# Altium PCB Receiver.PcbDoc
Units mm, origin at the board's own origin, x right, y up, seen from the top; angles counter-clockwise.
Board outline 76.07 x 76.47 mm, 2 copper layers (Top Layer, Bottom Layer); 36 components, 36 nets, 131 pads, 12 vias.
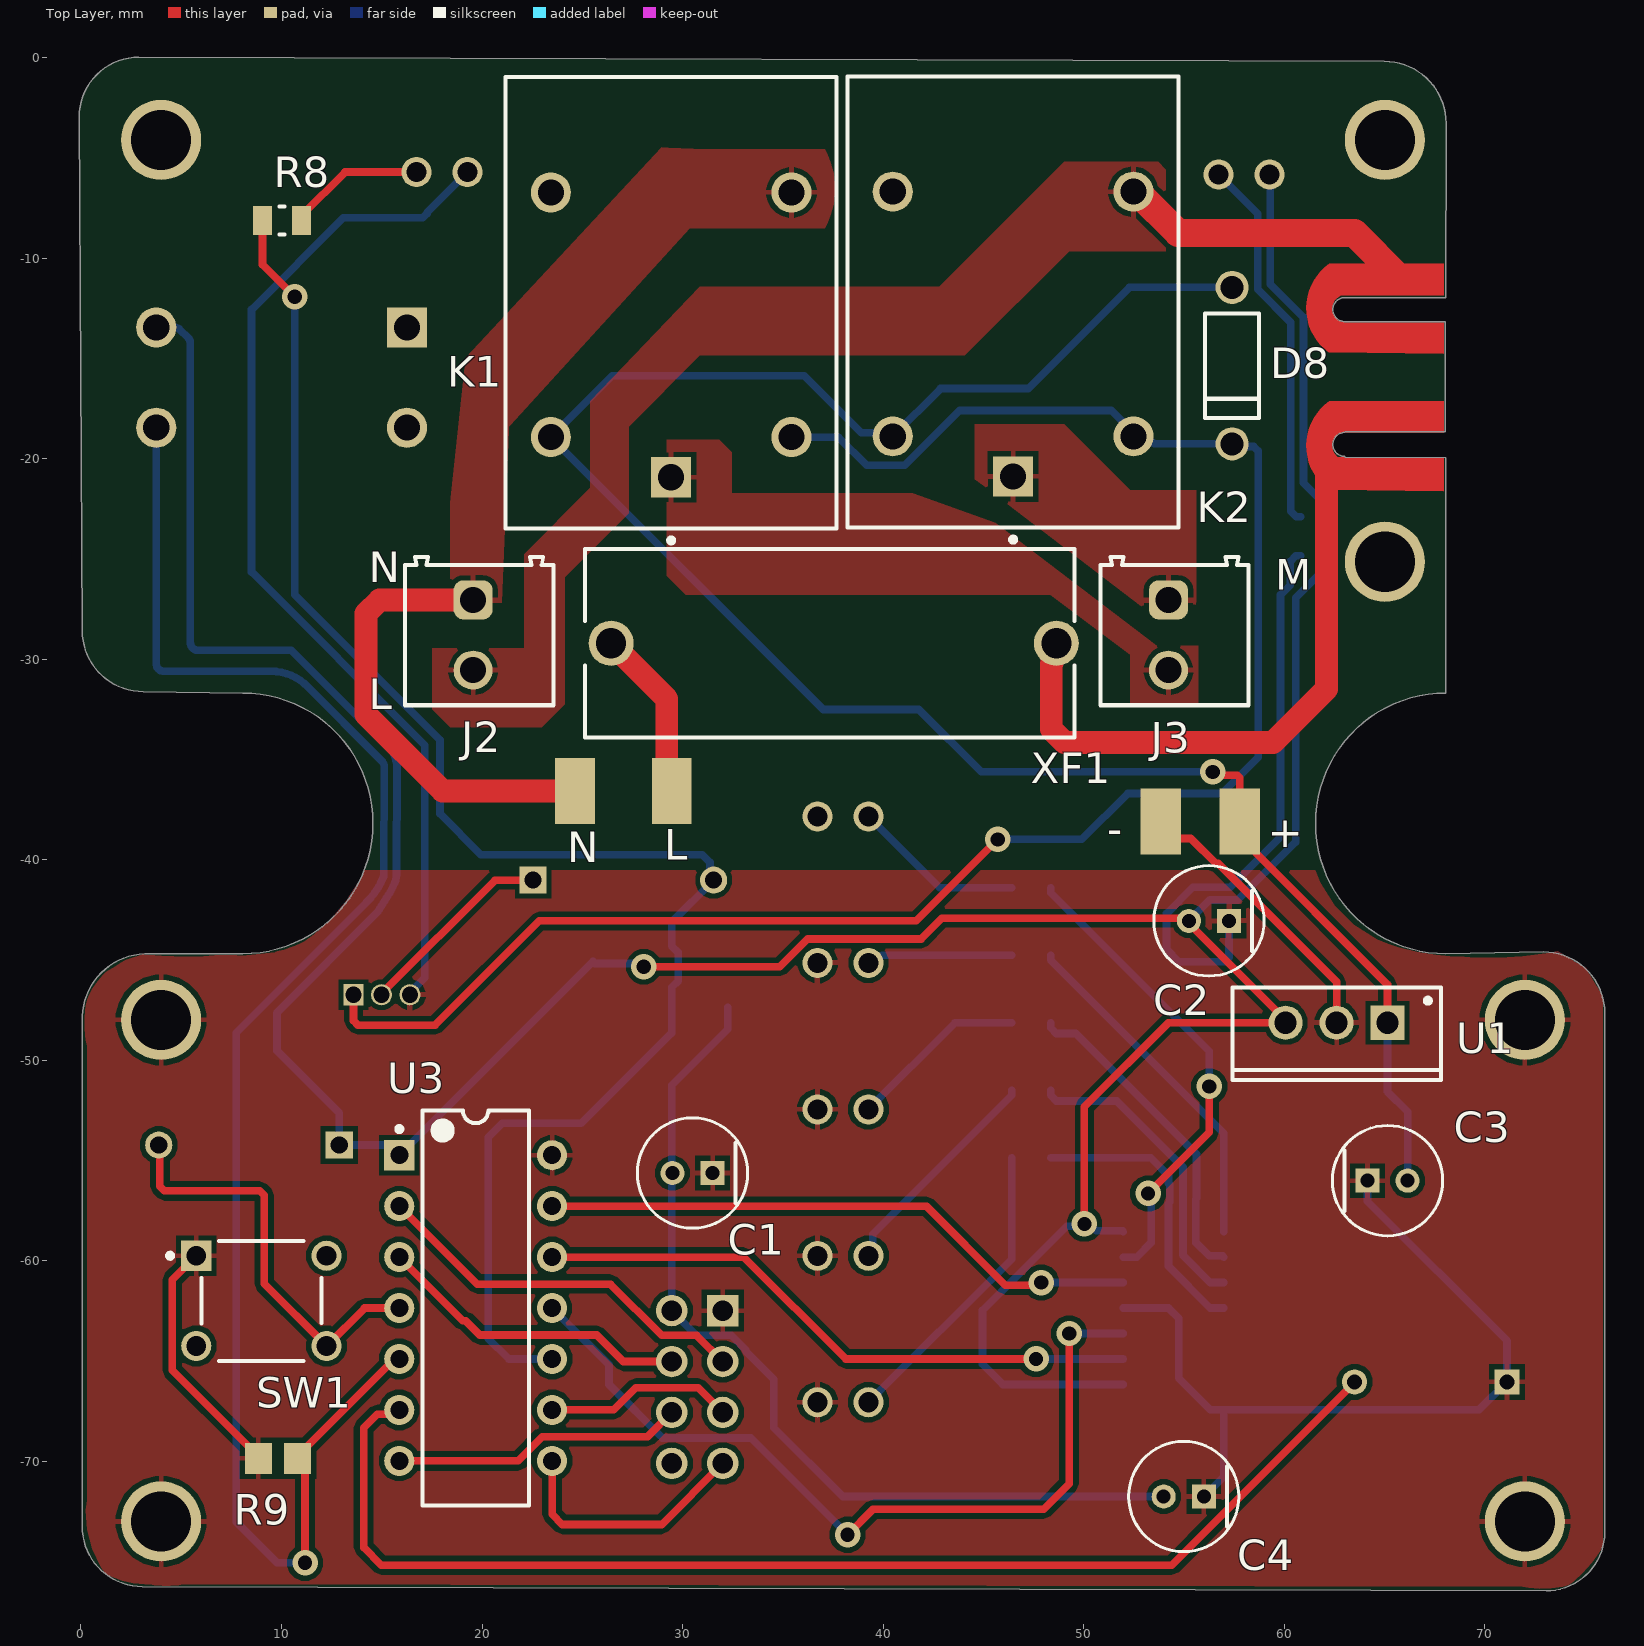
[diagram p0: Top Layer view]
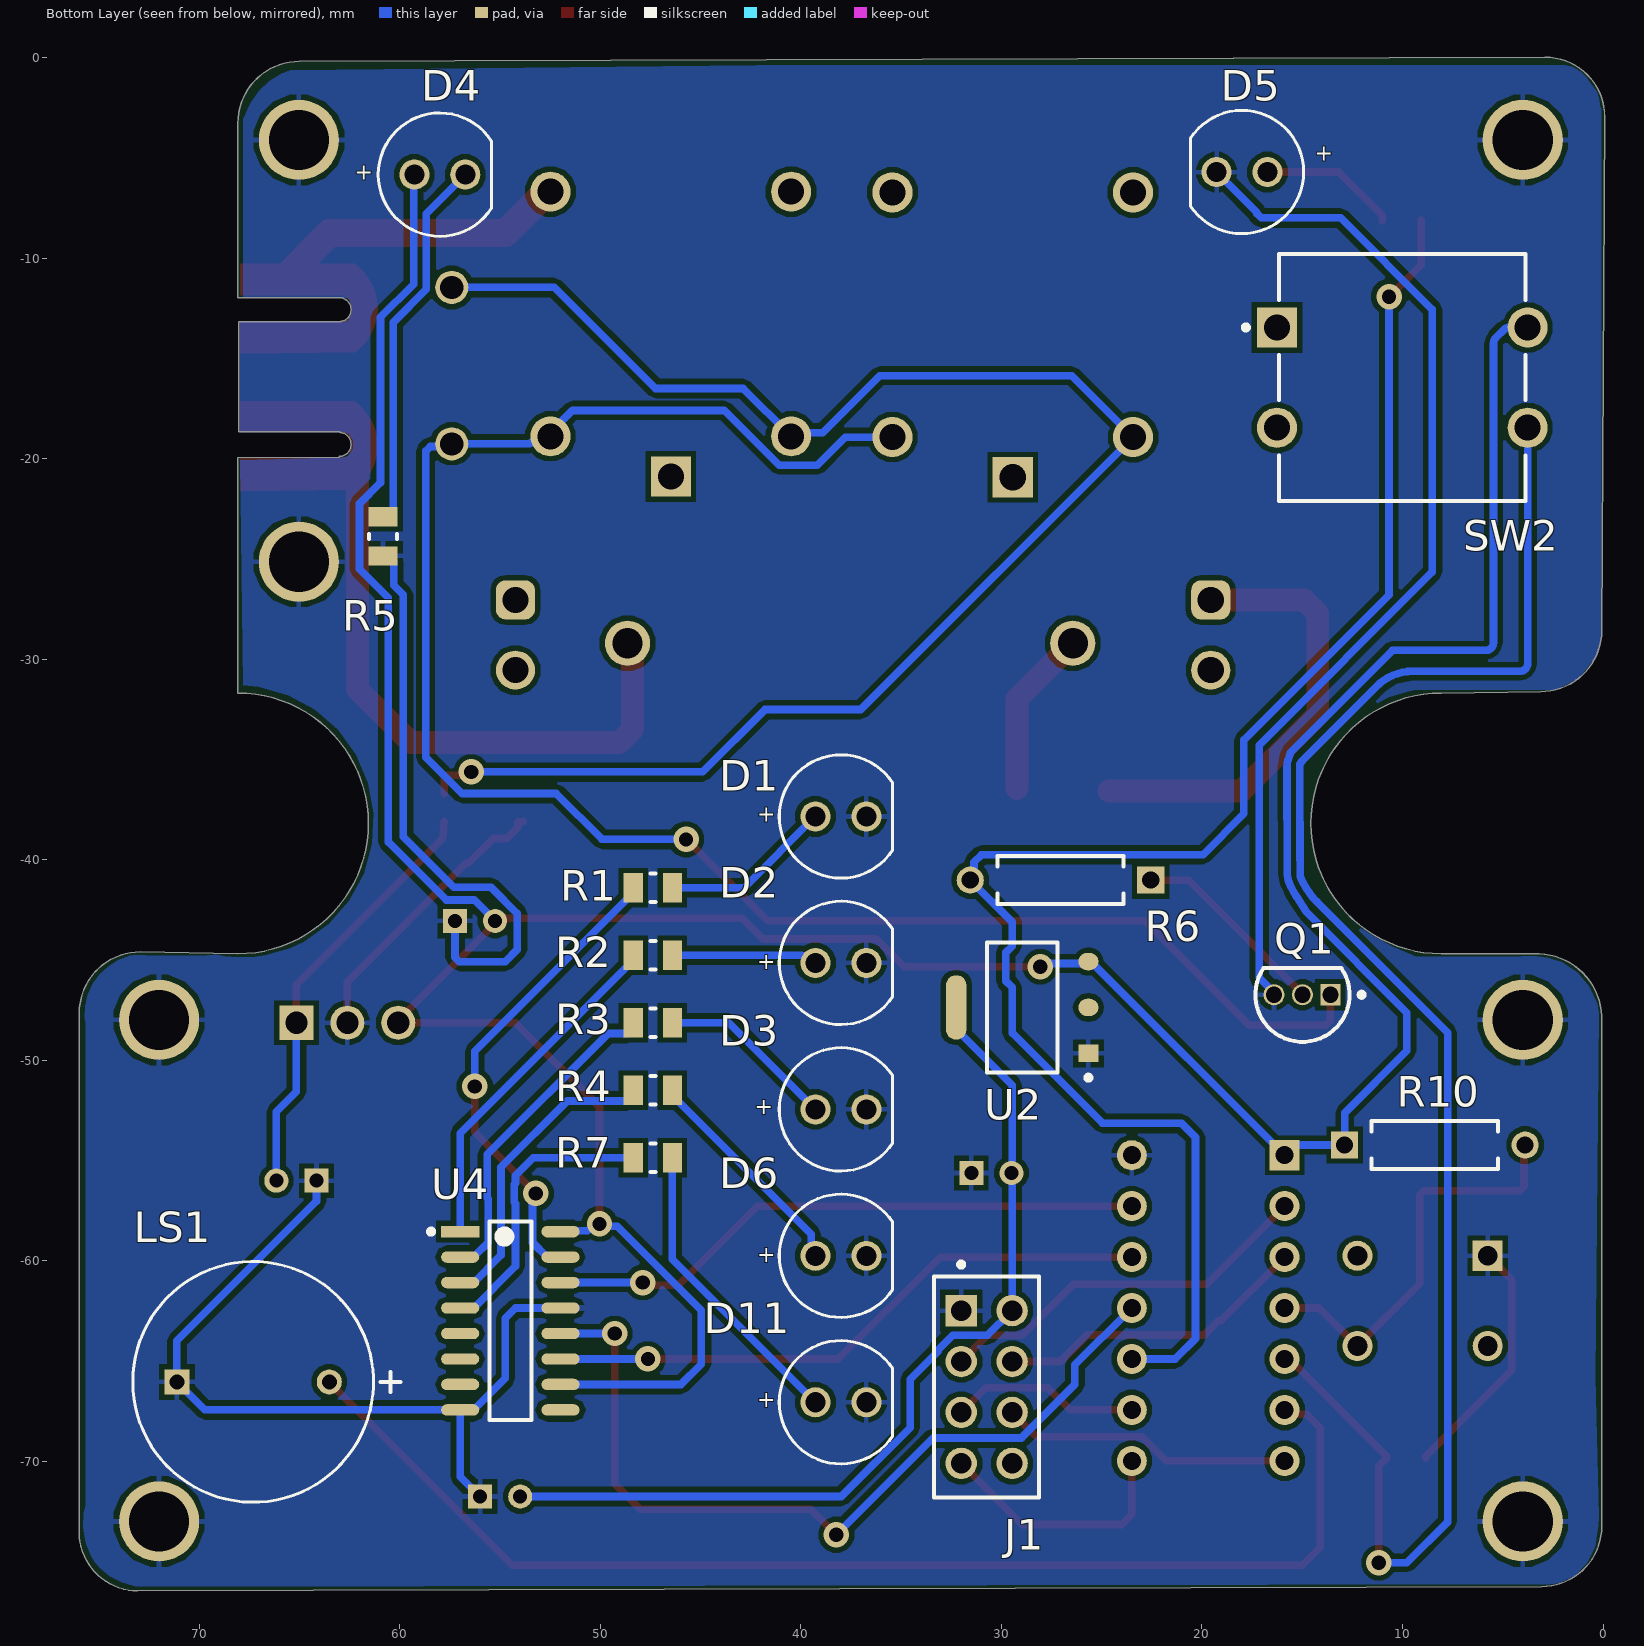
[diagram p1: Bottom Layer view, seen from below]
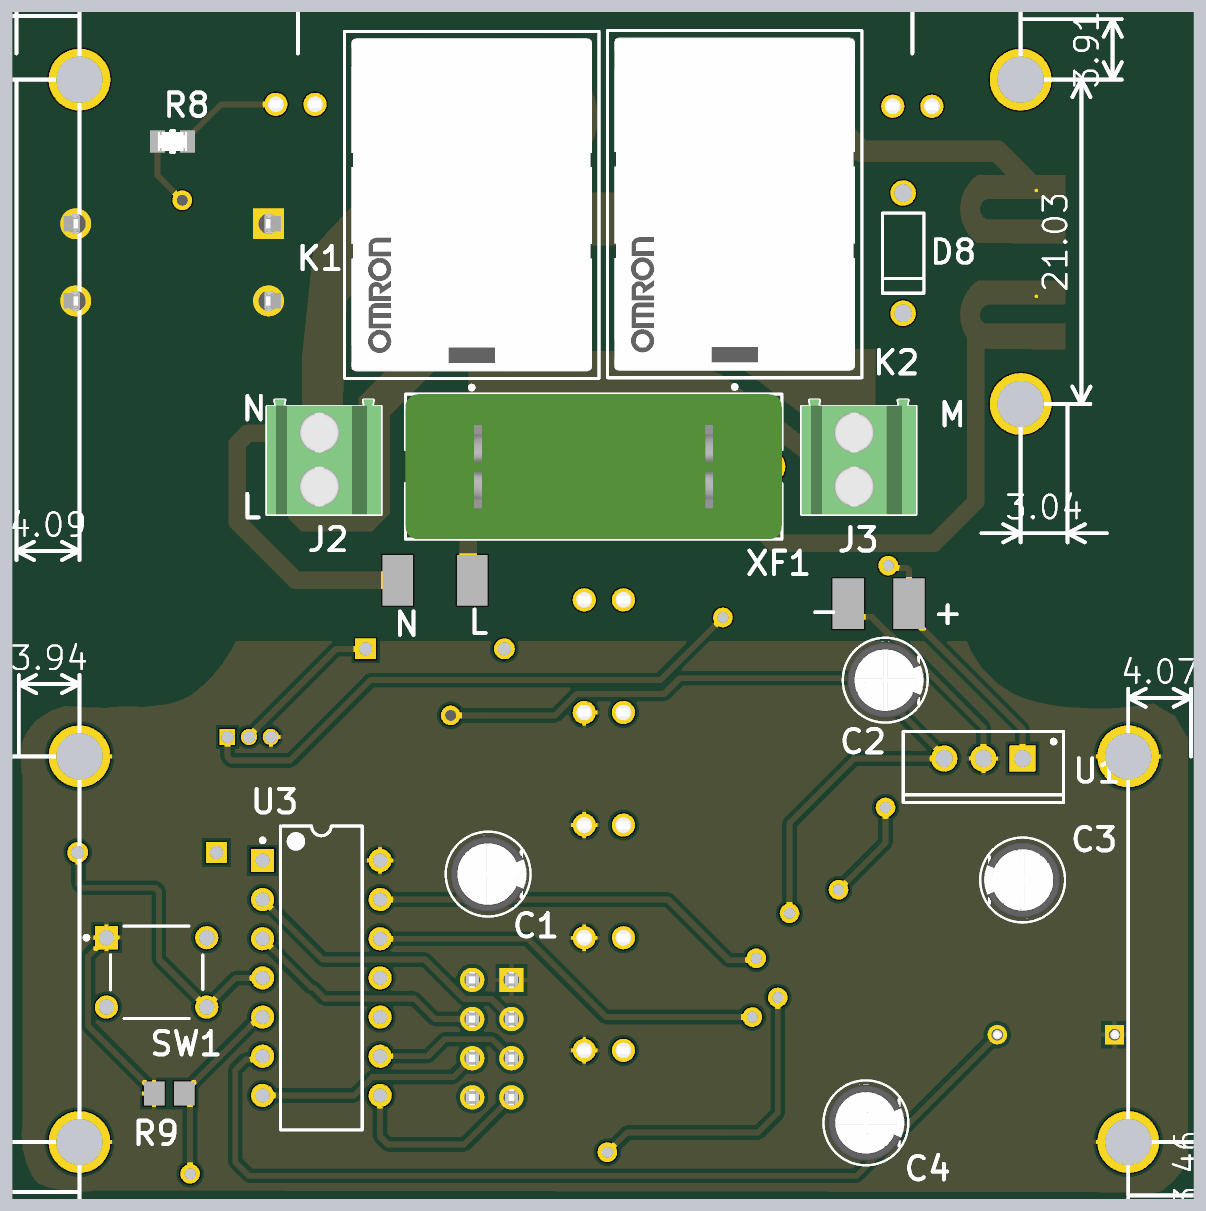
[diagram p2: 3D render of the assembled board from above, using the file's embedded part models]
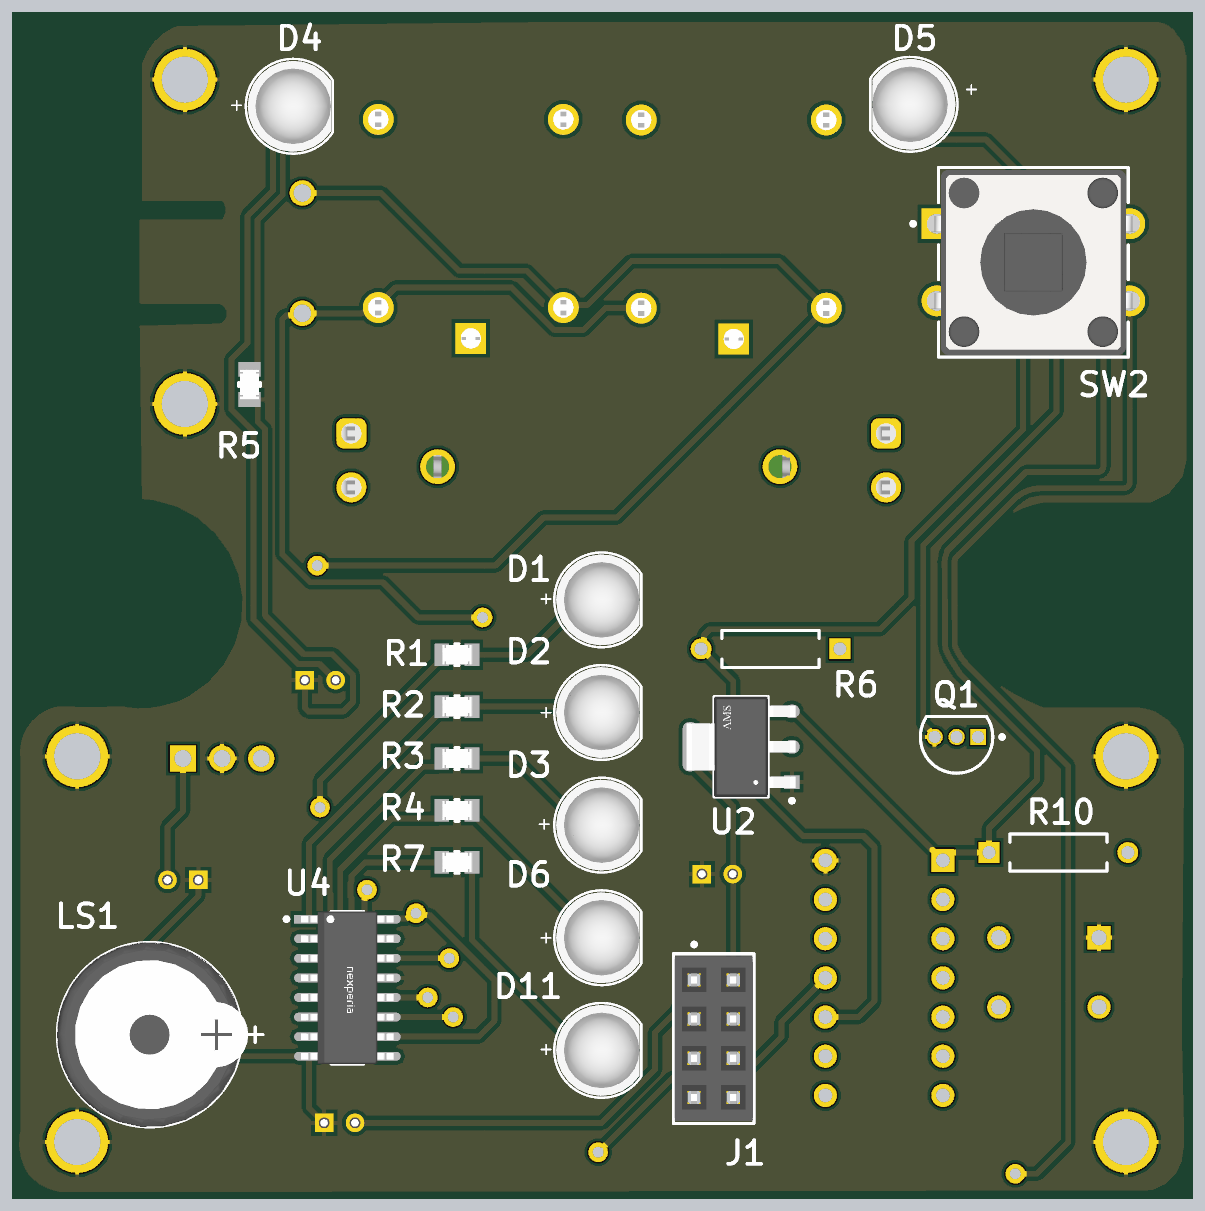
[diagram p3: 3D render of the assembled board from below, using the file's embedded part models]

## Layer stack, top to bottom
Top Solder: solder mask 0.0102, Solder Resist, Dk 3.5
Top Layer: signal copper 0.0356
Dielectric 1: dielectric 0.32, FR-4, Dk 4.8
Bottom Layer: signal copper 0.0356
Bottom Solder: solder mask 0.0102, Solder Resist, Dk 3.5

## Board outline
0.064,-73.244 ccw(c3.065,-73.244) 3.065,-76.245 73.058,-76.457 ccw(c73.058,-73.533) 75.981,-73.533 75.981,-47.649 ccw(c72.933,-47.649) 72.933,-44.6 68.064,-44.691 cw(c68.064,-38.191) 68.064,-31.691 68.064,-19.968 68.064,-19.962 63.024,-19.927 63.024,-19.897 cw(c63.024,-19.297) 63.024,-18.697 63.024,-18.669 68.033,-18.669 68.033,-13.176 63.024,-13.176 63.024,-13.173 cw(c63.024,-12.573) 63.024,-11.973 63.024,-11.974 68.064,-11.974 68.071,-3.275 68.072,-3.275 ccw(c64.998,-3.275) 64.998,-0.202 2.893,0.013 ccw(c2.893,-2.965) -0.085,-2.965 0.064,-28.578 ccw(c3.107,-28.578) 3.107,-31.621 8.064,-31.691 cw(c8.064,-38.191) 8.064,-44.691 3.182,-44.691 ccw(c3.315,-47.942) 0.064,-47.809 0.064,-47.752

## Design rules (kind name [scope] priority, off if disabled: settings)
Clearance Clearance_1 [OnMid vs OnMid] p1: gap=0.254 ignorepadtopadclearanceinfootprint=FALSE sourcerule=41 cellrowname=All cellrowtype=0 cellcolname=All cellcoltype=0 innerlayers=TRUE
Clearance Clearance_2 [(ExistsOnLayer('Top Layer') Or ExistsOnLayer('Bottom Layer')) vs (ExistsOnLayer('Top Layer') Or ExistsOnLayer('Bottom Layer'))] p2: gap=0.254 ignorepadtopadclearanceinfootprint=FALSE sourcerule=41 cellrowname=All cellrowtype=0 cellcolname=All cellcoltype=0 outerlayers=TRUE
Clearance [All] p3: gap=0.254 ignorepadtopadclearanceinfootprint=FALSE ismatrix=TRUE
HoleSize MaxMinHoleSize_2 [All] p1: absolutevalues=TRUE maxlimit=6.54 minlimit=0.254 maxpercent=80.000 minpercent=20.000
HoleSize [All] p2: absolutevalues=TRUE maxlimit=6.54 minlimit=0.025 maxpercent=80.000 minpercent=20.000
MinimumSolderMaskSliver [All] p1: minsoldermaskwidth=0.127
PolygonConnect [All] p1: connectstyle=Relief reliefconductorwidth=0.254 reliefentries=4 polygonreliefangle="90 Angle" airgapwidth=0.254
RoutingVias [All] p1: holewidth=0.711 width=1.27 viastyle="Through Hole" minholewidth=0.711 minwidth=1.27 maxholewidth=0.711 maxwidth=1.27
SilkToSilkClearance [All] p1: silktosilkclearance=0.127
SilkToSolderMaskClearance SilkToSolderMaskClearance_1 [All] p1: minsilkscreentomaskgap=0 clearancetoexposedcopper=TRUE
SilkToSolderMaskClearance [IsPad] p2: minsilkscreentomaskgap=0.127 clearancetoexposedcopper=TRUE
SolderMaskExpansion [All] p1: expansion=0.102 istentingtop=FALSE
Width MaxMinWidth_4 [All] p1: maxlimit=0.381 minlimit=0.254 preferedwidth=0.254 minimp=50.000000 maximp=50.000000 favimp=50.000000
Width MaxMinWidth_2 [All] p2: maxlimit=0.635 minlimit=0.254 preferedwidth=0.254 minimp=50.000000 maximp=50.000000 favimp=50.000000
Width MaxMinWidth_1 [All] p3: maxlimit=0.635 minlimit=0.254 preferedwidth=0.381 minimp=50.000000 maximp=50.000000 favimp=50.000000
Width MaxMinWidth_3 [All] p4: maxlimit=0.254 minlimit=0.254 preferedwidth=0.254
26 further rules are at their usual default settings.

## Components (designator, comment, footprint, x,y, rotation, side; value= is the part's Value field where it differs from the comment)
C1 "EEUFR1H100" FP-RAD-TH-D_5_0_5-L_11_1-MFG 30.496,-55.626 r180 top
C2 "EEUFR1H100" FP-RAD-TH-D_5_0_5-L_11_1-MFG 56.245,-43.053 r180 top
C3 "EEUFR1H100" FP-RAD-TH-D_5_0_5-L_11_1-MFG 65.151,-56.007 r0 top
C4 "EEUFR1H100" FP-RAD-TH-D_5_0_5-L_11_1-MFG 54.991,-71.755 r180 top
D1 "151051BS04000" WL-TMRC_D5.9H8.7 38,-37.846 r180 bottom
D2 "151051BS04000" WL-TMRC_D5.9H8.7 38,-45.149 r180 bottom
D3 "151051BS04000" WL-TMRC_D5.9H8.7 38,-52.451 r180 bottom
D4 "151051VS04000" WL-TMRC_D5.9H8.7 58,-5.842 r180 bottom
D5 "151051BS04000" WL-TMRC_D5.9H8.7 18,-5.715 r0 bottom
D6 "151051BS04000" WL-TMRC_D5.9H8.7 38,-59.754 r180 bottom
D8 "1N4007" FAIR-DO-41-2 57.404,-15.367 r270 top
D11 "151051BS04000" WL-TMRC_D5.9H8.7 38,-67.056 r180 bottom
J1 "PPTC042LFBN-RC" FP-PPTC042LFBN-RC-MFG 30.734,-66.294 r270 bottom
J2 "691214110002" 691214110002 19.858,-28.801 r270 top
J3 "691214110002" 691214110002 54.529,-28.801 r270 top
K1 "G5LE-1-E DC24" FP-G5LE-1-E_DC24-MFG 29.433,-12.231 r90 top
K2 "G5LE-1-E DC24" FP-G5LE-1-E_DC24-MFG 46.482,-12.192 r90 top
LS1 "MCKPX-G1203A-K4056" FP-MCKPX-G1203A-K4056-MFG 67.31,-66.04 r180 bottom
Q1 "P2N2222AG" ONSC-TO-92-3-29-11 14.986,-46.736 r0 bottom
R1 "CRCW0805330RFKEA" FP-CRCW0805-e3-MFG 47.381,-41.402 r180 bottom
R2 "CRCW0805330RFKEA" FP-CRCW0805-e3-MFG 47.381,-44.767 r180 bottom
R3 "CRCW0805330RFKEA" FP-CRCW0805-e3-MFG 47.381,-48.133 r180 bottom
R4 "CRCW0805330RFKEA" FP-CRCW0805-e3-MFG 47.381,-51.498 r180 bottom
R5 "CRCW0805330RFKEA" FP-CRCW0805-e3-MFG 60.833,-23.876 r90 bottom
R6 "MFR-25FBF52-47K5" RESA60-630X240 27.051,-41.021 r0 bottom value=1k
R7 "CRCW0805330RFKEA" FP-CRCW0805-e3-MFG 47.381,-54.864 r180 bottom
R8 "CRCW0805330RFKEA" FP-CRCW0805-e3-MFG 10.033,-8.128 r180 top
R9 "ERJ-6ENF1001V" RESC2013X70X40ML20T20 9.82,-69.85 r0 top
R10 "MFR-25FBF52-47K5" RESA60-630X240 8.382,-54.229 r180 bottom value=10k
SW1 "1825910-6" TECO-1825910-6_V 9,-62 r0 top
SW2 "FSM103" FP-FSM103-MFG 10.006,-15.962 r0 bottom
U1 "L7805CV" TO220 62.611,-48.133 r180 top
U2 "AMS1117-3.3" FP-AMS1117-IPC_C 28.956,-47.371 r0 bottom
U3 "ATtiny84-20PU" 14P3 19.685,-62.357 r0 top
U4 "74HC595D,118" FP-SOT109-1-IPC_B 54.483,-62.992 r180 bottom
XF1 "696108003002" 696108003002 37.338,-29.21 r0 top

## Footprints (in the part's own frame and the unit in brackets; to place one, negate y for a bottom-side part, rotate by r counter-clockwise, add the part's x,y. Pads: shape width x height; smd on the part's side, far side on the other; paste and mask are expansions set on the pad)
14P3 [mm] "DIP, 14-Pin, Row Spacing 7.62 mm, Pitch 2.54 mm"
  rect 1.5x1.5 hole 0.9: 1(-3.81,7.62)
  round 1.5 hole 0.9: 2(-3.81,5.08) 3(-3.81,2.54) 4(-3.81,0) 5(-3.81,-2.54) 6(-3.81,-5.08) 7(-3.81,-7.62) 8(3.81,-7.62) 9(3.81,-5.08) 10(3.81,-2.54) 11(3.81,0) 12(3.81,2.54) 13(3.81,5.08) 14(3.81,7.62)
  silkscreen extent -3.93,-9.85 2.65,9.85, body extent -3.55,-9.85 3.55,9.85, height 5.33
691214110002 [mm] "3.50 mm Horizontal Entry Modular, 2p"
  rrect50% 1.95x1.95 hole 1.3: 1(-1.75,-0.3)
  round 1.95 hole 1.3: 2(1.75,-0.3)
  silkscreen extent -3.9,-3.7 3.5,3.7, body extent -3.95,-3.7 3.5,3.7, height 8.55
696108003002 [mm] "FUSEHOLDER BLOCKS - PCB - CLIP COVER - THT"
  round 2.25 hole 1.5: 1(-10.9,0) 2(11.3,0)
  silkscreen extent -12.2,-4.7 12.2,4.7, body extent -12.2,-4.7 12.2,4.7, height 11.55
FAIR-DO-41-2 [mm] "THD, 2-Leads, Body 5.2x2.72mm, Pin Spacing 7.8mm"
  round 1.65 hole 1.15: 1(-3.9,0) 2(3.9,0)
  silkscreen extent -2.6,-1.35 2.6,1.35, body extent -4.29,-1.17 4.29,1.17, height 2.35
FP-AMS1117-IPC_C [mm]
  rect 1.004x0.872 smd paste+0 mask+0: 1(-3.295,2.29)
  rrect100% 1.004x0.872 smd paste+0 mask+0: 2(-3.295,0) 3(-3.295,-2.29)
  rrect87% 1.004x3.182 smd paste+0 mask+0: 4(3.295,0)
  silkscreen extent -3.42,-3.25 1.75,3.62, body extent -3.53,-3.25 3.53,3.25, height 1.8
FP-CRCW0805-e3-MFG [mm]
  rect 0.95x1.45 smd paste+0 mask+0: 1(-0.975,0) 2(0.975,0)
  silkscreen extent -0.13,-0.7 0.13,0.7, body extent -1,-0.63 1,0.63, height 0.5
FP-FSM103-MFG [mm]
  rect 2x2 hole 1.3 paste-2539.97 mask+0: 1(6.25,-2.5)
  round 2 hole 1.3 paste-2539.97 mask+0: 2(-6.25,-2.5) 3(6.25,2.5) 4(-6.25,2.5)
  silkscreen extent -6.15,-6.15 7.93,6.15, body extent -7.05,-6 7.05,6, height 7.36
FP-G5LE-1-E_DC24-MFG [mm]
  rect 2x2 hole 1.3 paste-2539.97 mask+0: 1(-8.7,0)
  round 2 hole 1.3 paste-2539.97 mask+0: 2(-6.7,-6) 3(5.5,-6) 4(5.5,6) 5(-6.7,6)
  silkscreen extent -11.97,-8.25 11.25,8.25, body extent -11.35,-8.35 11.35,8.35, height 0.25
FP-MCKPX-G1203A-K4056-MFG [mm]
  rect 1.25x1.25 hole 0.75 paste-2539.97 mask+0: 1(-3.8,0)
  round 1.25 hole 0.75 paste-2539.97 mask+0: 2(3.8,0)
  silkscreen extent -6,-6 7.35,6, body extent -6,-6 6.38,6, height 9.5
FP-PPTC042LFBN-RC-MFG [mm]
  rect 1.57x1.57 hole 1.02 paste-2539.97 mask+0: 1(-3.81,-1.27)
  round 1.57 hole 1.02 paste-2539.97 mask+0: 2(-3.81,1.27) 3(-1.27,-1.27) 4(-1.27,1.27) 5(1.27,-1.27) 6(1.27,1.27) 7(3.81,-1.27) 8(3.81,1.27)
  silkscreen extent -6.23,-2.62 5.51,2.62, body extent -5.33,-2.54 5.33,2.54, height 8.65
FP-RAD-TH-D_5_0_5-L_11_1-MFG [mm]
  rect 1.2x1.2 hole 0.7 paste-2539.97 mask+0: 1(-1,0)
  round 1.2 hole 0.7 paste-2539.97 mask+0: 2(1,0)
  silkscreen extent -2.75,-2.75 2.75,2.75, body extent -2.85,-2.85 2.85,2.85, height 0.25
FP-SOT109-1-IPC_B [mm]
  rect 1.904x0.568 smd paste+0 mask+0: 1(-2.501,4.445)
  rrect100% 1.904x0.568 smd paste+0 mask+0: 2(-2.501,3.175) 3(-2.501,1.905) 4(-2.501,0.635) 5(-2.501,-0.635) 6(-2.501,-1.905) 7(-2.501,-3.175) 8(-2.501,-4.445) 9(2.501,-4.445) 10(2.501,-3.175) 11(2.501,-1.905) 12(2.501,-0.635) 13(2.501,0.635) 14(2.501,1.905) 15(2.501,3.175) 16(2.501,4.445)
  silkscreen extent -4.08,-4.95 1.05,4.95, body extent -3,-4.95 3,4.95, height 1.75
ONSC-TO-92-3-29-11 [mm] "TO, 3-Leads, Body Dia 4.7mm, Pitch 1.27mm"
  rect 1x1.05 hole 0.8: 1(-1.391,0)
  round 1.05 hole 0.8: 2(0,0) 3(1.422,0)
  silkscreen extent -3.07,-1.34 2.35,2.35, body extent -2.35,-1.33 2.36,2.36, height 7.87
RESA60-630X240 [mm] "Axial Resistor, 2-Leads, Dia 2.4mm, Body Length 6.3mm"
  rect 1.35x1.35 hole 0.85: 1(-4.5,0)
  round 1.35 hole 0.85: 2(4.5,0)
  silkscreen extent -3.15,-1.2 3.15,1.2, body extent -4.78,-1.2 4.78,1.2, height 2.4
RESC2013X70X40ML20T20 [mm] "Chip Resistor, 2-Leads, Body 2.00x1.25mm, IPC Low Density"
  rect 1.35x1.55 smd: 1(-0.975,0) 2(0.975,0)
  body extent -1.1,-0.72 1.1,0.72, height 0.7
TECO-1825910-6_V [mm] "Switch, 4-Leads, Body 5.99x5.99mm"
  rect 1.5x1.5 hole 0.99: 1(-3.25,2.25)
  round 1.5 hole 0.99: 2(3.25,2.25) 3(-3.25,-2.25) 4(3.25,-2.25)
  silkscreen extent -4.67,-3 2.99,3, body extent -3,-2.99 3,3, height 5
TO220 [mm] "TO, Thru-Hole, Vertical, Heatsink Mounted; 3 In-Line Leads; Pitch 2.54 mm"
  rect 1.7x1.7 hole 1.1: 1(-2.54,0)
  round 1.7 hole 1.1: 2(0,0) 3(2.54,0)
  silkscreen extent -5.2,-1.75 5.2,2.85, body extent -5.25,-1.8 5.25,2.9, height 19.7
WL-TMRC_D5.9H8.7 [mm] "THT Mono-color Round Color LED, 2-leads"
  round 1.5 hole 1: 1(-1.27,0) 2(1.27,0)
  silkscreen extent -3.07,-3.07 2.58,3.08, body extent -2.95,-2.94 2.45,2.94, height 9.2

## Part data
C1 C2 C3 C4: library part CMP-05427-001295-1, "Aluminum Electrolytic Capacitors (Radial Lead Type) 10uF ±20% 50V", Capacitance=10uF, Case/Package=Radial, Max Operating Temperature=105°C, Min Operating Temperature=-40°C, Ripple Current (AC)=250mA, Tolerance=20%, Voltage=50V, Construction=RADIAL, Diameter=5mm, Height=11mm, Impedance=340mR, Lead Diameter=0.5mm, Lead Pitch=2mm, Life (Hours)=5000Hour, REACH SVHC=Yes, RoHS Compliant=Yes, Series="FR Radial", Termination=Radial, Voltage Rating=50V
D1 D2 D3 D5 D6 D11: library part CMP-1488-00009-2, Case/Package=Radial, Color=Blue, Forward Current=100mA, Forward Voltage=3.2V, Max Operating Temperature=85°C, Max Reverse Voltage (DC)=5V, Min Operating Temperature=-40°C, Test Current=20mA, Dominant Wavelength=470nm, Height=8.6mm, Length=5mm, Lens Size=5mm, Lens Style="Circular, Diffused, Round", Luminous Intensity=500mcd, Mount="Through Hole", NexarPartId=29717812, Packaging=Bulk, Peak Wavelength=465nm, REACH SVHC=Unknown, RoHS=Compliant, Viewing Angle=40°, Wavelength=470nm, Width=5mm
D4: library part CMP-1488-00007-2, Case/Package=Radial, Color=Green, Forward Current=100mA, Forward Voltage=2.1V, Max Operating Temperature=85°C, Max Reverse Voltage (DC)=5V, Min Operating Temperature=-40°C, Test Current=20mA, Dominant Wavelength=572nm, Height=8.6mm, Length=5mm, Lens Size=5mm, Lens Style="Circular, Diffused, Round", Luminous Intensity=140mcd, Mount="Through Hole", NexarPartId=29717814, Packaging=Bulk, Peak Wavelength=573nm, REACH SVHC=Unknown, RoHS=Compliant, Viewing Angle=40°, Wavelength=572nm, Width=5mm
D8: library part CMP-004-00007-2, "General Purpose Rectifier, 1.1 V, 1.0 A, -55 to 175 degC, 2-Pin DO-41, RoHS, Tape and Reel", Case/Package=DO-41-2, Forward Current=1A, Forward Voltage=1.1V, Manufacturer=Fairchild, Max Operating Temperature=175°C, Max Surge Current=30A, Min Operating Temperature=-55°C, Package Description="2-Pin Axial Lead, Dia 2.375 mm, Body Length 4.63 mm", Package Quantity=5000, Package Version="Rev. 2, 09/2008", Peak Reverse Current=5uA, Datasheet URL=https://www.fairchildsemi.com/datasheets/1N/1N4007.pdf, Datasheet Version="Rev. 1.1.0, 11/2014", Elements=1, Manufacturer URL=https://www.fairchildsemi.com/, Mounting Technology=TH, Package Reference=DO-41-2, Package URL=http://www.fairchildsemi.com/dwg/DO/DO41A.pdf, Packaging=TapeandReel, Pins=2, RoHS Compliant=True
J1: library part CMP-25680-000004-1, "CONN HDR 8POS 0.1 TIN PCB", Current Rating=3A, Manufacturer=Sullins, Temperature="-40°C to +105°C", Temperature Range High=+105°C, Temperature Range Low=-40°C, Voltage Rating=250V, Automotive=No, Category=Conn, ComponentLink2Description=Datasheet, ComponentLink2URL=https://drawings-pdf.s3.amazonaws.com/10492.pdf, Conn Gender=Female, Conn Orientation=Straight, Contact Material=Tin,Nickel, Device Class L1=Connectors, Device Class L2="Headers and Wire Housings", Device Class L3=unset, Digikey Description="CONN HDR 8POS 0.1 TIN PCB", Height=8.65mm, Is Female=yes, Lead Free=Yes, Manufacturer Part Number=PPTC042LFBN-RC, Number of Contacts=8, Number of Rows=2, Octopart=https://octopart.com/pptc042lfbn-rc-sullins-271088, Package=PPTC042LFBN-RC, Pitch=2.54mm, RoHS=TRUE
J2 J3: library part CMP-1502-02464-2, Color="Blue, Green", Current=10A, Max Operating Temperature=105°C, Min Operating Temperature=-40°C, Voltage=300V, Contact Material=Brass, Contact Plating="Brass, Tin", Current Rating=10A, Height=8.7mm, Housing Material=Nylon, Lead Pitch=3.5mm, Length=7.4mm, Mount="Through Hole", NexarPartId=18818288, Number of Contacts=2, Number of Levels=1, Number of Pins=2, Number of Positions Per Level=2, Number of Rows=1, Packaging=Box, Pitch=3.5052mm, Plating="Brass, Steel", REACH SVHC=Unknown, RoHS=Compliant, Stripping Length=-6mm, Termination=Screw, Voltage Rating=300V, Width=7.9mm, Wire Gauge (Max)=24AWG, Wire Gauge (Min)=16AWG, Wire/Cable Gauge=24AWG
K1 K2: library part CMP-08822-000256-1, "RELAY GEN PURPOSE SPDT 16A 24V", Coil Current=16.7mA, Coil Power=400mW, Coil Resistance=1.44kR, Coil Voltage (DC)=24V, Contact Current Rating=16A, Max Operating Temperature=85°C, Max Voltage Rating (AC)=250V, Min Operating Temperature=-40°C, Package Quantity=500, Application(s)=POWER, Coil Type=Non-Latching, Contact Material=Tin, Depth=16.5mm, Height=19mm, Lead Free="Lead Free", Length=22.5mm, Life (Hours)=1000000Hour, Max Current Rating=16A, Mount="Through Hole", Number of Pins=5, Operate Time=10ms, Packaging=Tray, Power Consumption=400mW, Radiation Hardening=No, Relay Type="General Purpose", Release Time=5ms, Series=G5LE-E, Termination="PC Pin", Throw Configuration=SPDT, Width=16.5mm
LS1: library part CMP-12433-000001-1, "MAGNETIC BUZZER AND TRANSDUCER - More Details", Current=30mA, Frequency=2300Hz, Manufacturer="Multicomp Pro", Max Supply Voltage=5V, Min Supply Voltage=2V, Operating Supply Voltage=3V, Package=0, Temperature="-20°C to +70°C", Temperature Range High=+70°C, Temperature Range Low=-20°C, Automotive=No, Category=Speak, ComponentLink2Description=Datasheet, ComponentLink2URL=http://www.farnell.com/datasheets/1498149.pdf?_ga=2.17855225.1157923166.1572356775-536200964.1569240579, Device Class L1=Electromechanical, Device Class L2="Audio Products", Device Class L3=Buzzers, Height=9.5mm, Lead Free=Yes, Manufacturer Part Number=MCKPX-G1203A-K4056, Octopart=https://octopart.com/mckpx-g1203a-k4056-multicomp-12157154, RoHS=TRUE, Standoff Height=0.5mm
Q1: library part CMP-1048-01402-1, "Amplifier Transistor, NPN Silicon, 3-Pin TO-92, Pb-Free, Bulk Box", Manufacturer="On Semiconductor", ComponentLink1Description="Manufacturer URL", ComponentLink1URL=http://www.onsemi.com/, ComponentLink2Description=Datasheet, ComponentLink2URL=http://www.onsemi.com/pub_link/Collateral/P2N2222A-D.PDF, ComponentLink3Description="Package Specification", ComponentLink3URL=http://www.onsemi.cn/pub_link/Collateral/2N6426-D.PDF, DatasheetVersion="Rev. 7", fT Min (MHz)=300, IC Continuous (A)=0.6, Mounting Technology="Through Hole", PackageDescription="3-Pin Transistor Outline, Body 4.825 x 3.685 mm, Pitch 1.27 mm", PackageReference=TO-92-3-29-11_AM_SL, PackageVersion="Rev. AM", Packing="Bulk Box", PartNumber=P2N2222AG, Polarity=NPN, RoHS=TRUE
R1 R2 R3 R4 R5 R7 R8: library part CMP-2001-03823-2, "RES Thick Film, 330Ω, 1%, 0.125W, 100ppm/°C, 0805", Case Code (Imperial)=0805, Case Code (Metric)=2012, Max Operating Temperature=155°C, Max Power Dissipation=125mW, Min Operating Temperature=-55°C, Package Quantity=10, Resistance=330R, Temperature Coefficient=100ppm/°C, Tolerance=1%, Voltage Rating=150V, Case/Package=0805, Composition="Thick Film", Contact Plating=Tin, Depth=1.25mm, Features="Automotive AEC-Q200", Height=0.02inch, Lead Free="Lead Free", Length=2mm, Military Standard=Not, Mount="Surface Mount", Number of Terminations=2, Packaging="Tape and Reel", Power Rating=125mW, Termination=SMD/SMT, Voltage Rating (DC)=150V, Weight=0.000194oz, Width=0.049inch
R6 R10: library part CMP-009-00057-4, "Axial Resistor, 47.5 KOhm, +/- 1%, 0.25 W, -55 to 155 degC, 2-Pin THD, RoHS, Bulk", Case/Package=Axial, Manufacturer=Yageo, Max Operating Temperature=155°C, Min Operating Temperature=-55°C, Package Description="2-Pin Axial Lead, Dia 2.4 mm, Body Length 6.3 mm", Package Quantity=200, Package Reference=MFR-25, Power=250mW, Tolerance=1%, Voltage Rating=250V, Datasheet URL=http://www.yageo.com/documents/recent/Yageo%20LR_MFR_2013.pdf, Datasheet Version=Apr-13, Manufacturer URL=http://www.yageo.com/, Mounting Technology=TH, Packaging=Bulk, RoHS Compliant=True
R9: library part CMP-2001-04375-5, "Chip Resistor, 1 KOhm, +/- 1%, 0.125 W, -55 to 155 degC, 0805 (2012 Metric), RoHS, Tape and Reel", Manufacturer=Panasonic, Max Operating Temperature="155 degC", Min Operating Temperature="-55 degC", Package Quantity=1, Voltage Rating="150 V", ComponentLink1Description="Manufacturer URL", ComponentLink1URL=http://www.panasonic.com/, ComponentLink2Description=Datasheet, ComponentLink2URL=http://industrial.panasonic.com/cdbs/www-data/pdf/RDA0000/AOA0000C86.pdf, DatasheetVersion=04/2015, Height="0.6 mm", Length="2 mm", Mount="Surface Mount", Mounting Technology="Surface Mount", PackageDescription="2-Pin Surface Mount Device, Body 2 x 1.25 mm", PackageReference=0805, Packaging="Cut Tape", REACH SVHC=Yes, RoHSCompliant=true
SW1: library part CMP-1684-00021-1, "Tact Switch, SPST-NO, 0.05 A, -35 to 85 degC, 4-Pin THD, RoHS, Bulk", Actuator Color=Black, Contact Rating @ Voltage=0.05A@24VDC, Dielectric Strength=500VAC, Manufacturer="TE Connectivity", Maximum AC Voltage Rating=N/A, Maximum Contact Resistance=100mOhm, Maximum DC Voltage Rating=24V, Minimum Insulation Resistance=100MOhm, Operating Temperature=-35to85C, Package Description="4-Pin Through Hole Device, Body 5.99 x 5.99 mm, Pitch 6.5 mm", Package Reference=THD, Actuator Length=1.4mm, Actuator Material=PolybutyleneTerephthalate, Actuator Style=RoundButton, Base Material=N/A, Body Orientation=Straight, Bushing Type=Unthreaded, Contact Material=CopperAlloy, Contact Plating=Silver, Datasheet URL=http://www.te.com/commerce/DocumentDelivery/DDEController?Action=showdoc&DocId=Customer+Drawing%7F1825910%7FC9%7Fpdf%7FEnglish%7FENG_CD_1825910_C9.pdf%7F1825910-6, Datasheet Version="Rev. C9", Dimension=5.99x5mm, Electrical Life=100000Cycles, Family=1825910, Function=MomentaryContact, Housing Material=N/A, Illumination=N/R, Manufacturer URL=http://www.te.com, Mechanical Life=100000Cycles, Mounting=ThroughHole, Packaging=N/A, Part No=1825910-6, Pole Throw Configuration=SPST, Product Weight=N/A, RoHS=Yes, Seal Description=N/A, Seal Location=N/A, Switch Configuration=OFF(ON), Terminal Type=PCPins, Thread Size=N/R
SW2: library part CMP-03407-000037-1, "SWITCH TACTILE SPST-NO 0.05A 24V", Actuator Color=Black, Contact Current Rating=50mA, Contact Resistance=100mR, Max Operating Temperature=85°C, Max Voltage Rating (DC)=12V, Min Operating Temperature=-35°C, Operating Force=1.57N, Package Quantity=400, Voltage Rating=24V, Actuator Length=3.4mm, Actuator Material=Polyester, Contact Material=Brass, Contact Plating=Silver, Current Rating=50mA, Depth=14.1mm, Electrical Life=100000Cycles, Illumination Type=Non-Illuminated, Length=12mm, Max Current Rating=50mA, Mechanical Life=100000Cycles, Mount="Through Hole", Orientation=Straight, Packaging="Loose Piece", Radiation Hardening=No, RoHS Compliant=Yes, Series="FSM100 ~ 104", Switch Function=Off-Mom, Switch Travel=0.3mm, Termination="PC Pins", Throw Configuration=SPST, Type=Switch, Voltage Rating (DC)=12V, Width=12mm
U1: library part CMP-0244-00483-1, "Positive Voltage Regulator, 5V, 3-Pin TO-220", ComponentLink1Description="Manufacturer URL", ComponentLink1URL=http://www.st.com, ComponentLink2Description=Datasheet, ComponentLink2URL=http://www.st.com/internet/com/TECHNICAL_RESOURCES/TECHNICAL_LITERATURE/DATASHEET/CD00000444.pdf, ComponentLink3Description="Package Specification", ComponentLink3URL=http://www.st.com/internet/com/TECHNICAL_RESOURCES/TECHNICAL_LITERATURE/PACKAGE_INFORMATION/CD00004649.pdf, DatasheetVersion=16/11/2011, PackageDescription="TO, Thru-Hole, Vertical, Heatsink Mounted; 3 In-Line Leads; Pitch 2.54 mm", PackageReference=TO220, PackageVersion=ver3.0
U2: library part CMP-209535-000001-1, "LDO Voltage Regulators 1A, 3.3V", Dropout Voltage=1.1V, Manufacturer="Advanced Monolithic Systems", Max Junction Temp=+125°C, Max Power Dissipation=1.2W, Max Supply Voltage=15V, Nominal Supply Current=5mA, Output Current=1A, Output Voltage=3.3V, Package=AMS1117, Temperature="-40°C to +125°C", Temperature Range Low=-40°C, Automotive=No, Category=IC, ComponentLink2Description=Datasheet, ComponentLink2URL=http://www.advanced-monolithic.com/pdf/ds1117.pdf, Device Class L1="Integrated Circuits (ICs)", Device Class L2="Power Management ICs", Device Class L3="Voltage Regulators - Linear", Height=1.8mm, Ipc Land Pattern Name=SOT229P700X180-4, Lead Free=Yes, Manufacturer Part Number=AMS1117-3.3, Number Of Outputs=1, Octopart=https://octopart.com/ams1117-3.3-advanced+monolithic+systems-25899300, Output Type=Fixed, RoHS=TRUE, Standoff Height=0.64mm, Temperature Range High=+125°C
U3: library part CMP-0093-00026-2, "8-bit AVR Microcontroller, 20MHz, 2.7-5.5V, 8KB Flash, 512 Bytes EEPROM, 512 Bytes SRAM, 14-pin PDIP, Industrial Grade (-40°C to 85°C), Pb-Free", Code_JEDEC=MS-001-AA, ComponentLink1Description="Manufacturer URL", ComponentLink1URL=http://www.atmel.com/, ComponentLink2Description="ATtiny24/44/84 Datasheet", ComponentLink2URL=http://www.atmel.com/dyn/resources/prod_documents/doc8006.pdf, ComponentLink3Description="ATtiny24/44/84 Summary", ComponentLink3URL=http://www.atmel.com/dyn/resources/prod_documents/8006S.pdf, DatasheetVersion="revK, Oct-2010", PackageDescription="14-Lead Plastic Dual In-Line, 300 mil/7.62 mm Wide Body (PDIP)", PackageReference=14P3, PackageVersion="revB, Oct-2010", RevisionNote="DatasheetVersion updated. URLs added."
U4: library part CMP-14351-000006-1, "IC SHIFT REGISTER 8BIT 16SOIC", RoHS Compliant=Yes
XF1: library part CMP-1502-00237-2, Fuse Current=10A, Voltage Rating (AC)=250V, Mount="Through Hole", NexarPartId=56808807, Packaging=Box, REACH SVHC=Unknown, RoHS=Non-Compliant

## Free pads (board coordinates)
  round 4 hole 3: 26(4,-73) 26(4,-47.99) 26(4,-4.115) 26(65.024,-25.146) 26(72,-73) 26(72,-47.99) 42(65.024,-4.115)
  rect 1.978x3.286 smd: 27(24.638,-36.576) 28(29.464,-36.576)
  rect 2.032x3.286 smd: 29(53.848,-38.1) 41(57.785,-38.1)
  round 0.025 smd: 44(66.04,-18.161) 44(66.04,-11.303)

## Via types
v1: diameter 1.27, hole 0.711, Top Layer to Bottom Layer, 12 vias

## Nets (pads, with @x,y where several pads share a name; then routed paths per layer and width w, separated by ;. In a path a pad name is that pad's centre, name@x,y a point inside that pad or via, vN(x,y) a via of type N, cw(c..) or ccw(c..) an arc to the next point about the centre after c; other vN are vias at no path point)
12V0: C3.2 D8.1 K1.5 K2.5 pad.41 U1.1 | length 103.1
  Top Layer w0.381: K2.5@40.307,-18.717 K2.5 ; v1(56.439,-35.623) 56.603,-35.787 57.646,-35.787 57.785,-35.926 pad.41@57.785,-36.703 ; pad.41 57.863,-38.94 65.151,-46.228 U1.1
  Bottom Layer w0.381: K2.5@40.307,-18.717 38.91,-18.717 36.068,-15.875 26.489,-15.875 K1.5 37.014,-32.512 41.783,-32.512 44.895,-35.623 v1(56.439,-35.623) ; K2.5 42.864,-16.51 47.244,-16.51 52.287,-11.467 D8.1 ; U1.1 65.151,-51.562 66.151,-52.562 C3.2
GND: C1.1 C2.1 C3.1 C4.1 D1.2 D2.2 D3.2 D5.2 D6.2 D11.2 J1.1 LS1.1 pad.26 pad.29 pad.42 Q1.3 R5.1 R9.1 SW1.1 U1.2 U2.1 U3.14 U4.8 U4.13 | length 148.5
  Top Layer w0.381: SW1.1 4.555,-60.945 4.555,-65.46 8.845,-69.75 R9.1 ; pad.29 54.102,-38.119 54.102,-38.373 54.673,-38.945 55.342,-38.945 56.585,-40.188 56.698,-40.188 62.611,-46.101 U1.2
  Bottom Layer w0.381: Q1.3@16.306,-46.736 17.145,-45.897 17.145,-34.29 8.509,-25.654 8.509,-12.57 13.078,-8.001 17.049,-8.001 17.272,-7.778 17.272,-7.713 D5.2 ; U4.13 54.229,-62.357 54.737,-62.865 54.737,-65.858 56.316,-67.437 U4.8 ; C4.1 56.984,-70.762 U4.8 ; C2.1 57.245,-44.862 57.022,-45.085 54.737,-45.085 54.133,-44.481 54.133,-42.688 55.447,-41.373 57.306,-41.373 59.817,-38.862 59.817,-26.798 60.299,-26.316 60.299,-25.135 60.583,-24.851 R5.1 ; C3.1 64.151,-57.039 71.11,-63.998 LS1.1 69.713,-67.437 U4.8
N: J2.1 K1.3 pad.27 | length 22.6
  Top Layer w1.143: J2.1 14.894,-27.051 14.224,-27.721 14.224,-32.766 18.034,-36.576 pad.27
NetC1_2: C1.2 C4.2 J1.2 U2.4 | length 46.1
  Bottom Layer w0.381: U2.4 32.251,-48.46 29.464,-51.247 J1.2 30.693,-63.713 32.432,-63.713 33.147,-64.428 33.147,-64.516 34.544,-65.913 34.544,-68.317 37.982,-71.755 C4.2
NetC2_2: C2.2 D4.1 R10.1 SW2.2 U1.3 U2.3 U3.1 U4.10 U4.16 | length 186.2
  Top Layer w0.381: v1(28.067,-45.339) 34.85,-45.339 36.235,-43.954 41.898,-43.954 42.926,-42.926 55.118,-42.926 C2.2 55.245,-43.18 60.071,-48.006 U1.3 54.229,-48.133 50.038,-52.324 v1(50.038,-58.166)
  Bottom Layer w0.381: SW2.2 4.668,-13.462 cw(c4.668,-13.843) 4.937,-13.573 5.349,-13.985 cw(c5.08,-14.255) 5.461,-14.255 5.461,-29.181 ccw(c5.842,-29.181) 5.842,-29.562 10.494,-29.562 15.602,-34.671 15.602,-34.712 15.71,-35.045 cw(c14.743,-35.357) 15.759,-35.359 15.737,-40.752 cw(c14.721,-40.745) 15.66,-41.135 cw(c11.513,-39.402) 15.283,-41.849 14.8,-42.592 cw(c14.481,-42.384) 14.75,-42.654 9.779,-47.625 9.779,-49.53 12.882,-52.633 R10.1 15.367,-54.229 U3.1 25.531,-45.081 25.625,-45.175 27.903,-45.175 v1(28.067,-45.339) ; U4.10 45.974,-66.167 44.958,-65.151 44.958,-62.474 49.149,-58.283 49.921,-58.283 v1(50.038,-58.166) 50.279,-58.166 50.624,-58.511 51.946,-58.511 U4.16 ; C2.2 56.29,-42.008 57.687,-42.008 60.579,-39.116 60.579,-26.934 62.002,-25.51 62.002,-22.242 60.96,-21.199 60.96,-12.954 59.308,-11.302 59.308,-5.881 D4.1
NetD1_1: D1.1 R1.2 | length 8.6
  Bottom Layer w0.381: D1.1 42.826,-41.402 R1.2
NetD2_1: D2.1 R2.2 | length 7.3
  Bottom Layer w0.381: D2.1 39.573,-45.148 39.954,-44.767 R2.2
NetD3_1: D3.1 R3.2 | length 8.9
  Bottom Layer w0.381: D3.1 43.588,-48.133 R3.2
NetD4_2: D4.2 R5.2 | length 18.9
  Bottom Layer w0.381: D4.2 58.673,-7.786 58.673,-11.566 60.325,-13.217 60.325,-22.617 60.61,-22.901 R5.2
NetD5_1: D5.1 R8.1 | length 6.9
  Top Layer w0.381: R8.1 11.008,-7.878 13.171,-5.715 D5.1
NetD6_1: D6.1 R4.2 | length 11.2
  Bottom Layer w0.381: D6.1 39.484,-59.539 39.484,-58.671 46.406,-51.748 R4.2
NetD8_2: D8.2 K1.2 K2.2 Q1.1 | length 93.8
  Top Layer w0.381: Q1.1 13.595,-48.037 13.818,-48.26 17.653,-48.26 22.86,-43.053 41.656,-43.053 v1(45.72,-38.989) ; K2.2@52.482,-18.7 K2.2 K2.2@52.67,-19.079 ; D8.2@57.216,-19.079 D8.2
  Bottom Layer w0.381: K1.2 37.773,-18.931 39.178,-20.336 41.08,-20.336 43.815,-17.602 51.384,-17.602 K2.2@52.482,-18.7 ; v1(45.72,-38.989) 49.911,-38.989 52.197,-36.703 56.886,-36.703 58.705,-34.884 58.705,-19.626 58.482,-19.402 57.539,-19.402 D8.2 53.515,-19.267 53.449,-19.202 52.792,-19.202 K2.2
NetD11_1: D11.1 R7.2 | length 15.1
  Bottom Layer w0.381: D11.1 46.406,-59.92 R7.2
NetIC1_1: pad.28 XF1.1 | length 8.4
  Top Layer w1.143: XF1.1 29.21,-31.982 pad.28@29.21,-36.449
NetJ1_3: J1.3 U3.2 | length 19.3
  Top Layer w0.381: U3.2 19.76,-61.162 26.404,-61.162 28.955,-63.713 30.693,-63.713 J1.3
NetJ1_4: J1.4 U3.3 | length 15.7
  Top Layer w0.381: U3.3 19.05,-62.992 19.177,-62.992 19.887,-63.702 25.73,-63.702 27.051,-65.024 J1.4
NetJ1_5: J1.5 U3.9 | length 9.5
  Top Layer w0.381: U3.9 26.574,-67.437 27.677,-66.335 30.775,-66.335 J1.5
NetJ1_6: J1.6 U3.7 | length 14.6
  Top Layer w0.381: U3.7 21.806,-69.977 23.006,-68.777 28.251,-68.777 J1.6
NetJ1_7: J1.7 U3.8 | length 12.6
  Top Layer w0.381: U3.8 23.495,-72.644 24.003,-73.152 28.956,-73.152 J1.7
NetJ2_2: J2.2 K2.3 pad.44@66.04,-11.303 | length 15.4
  Top Layer w0.635: J2.2 J2.2@19.81,-30.299
  Top Layer w1.397: K2.3 52.645,-6.692 54.716,-8.763 63.5,-8.763 65.722,-10.986
NetJ3_1: J3.1 K2.1
NetJ3_2: J3.2 K1.1 | length 0
  Top Layer w0.635: J3.2@54.228,-30.55 J3.2
NetLS1_2: LS1.2 U3.6 | length 62
  Top Layer w0.381: U3.6 15.661,-67.651 14.772,-67.651 14.097,-68.326 14.097,-74.295 14.986,-75.184 54.391,-75.184 63.51,-66.065 LS1.2
  Bottom Layer w0.381: LS1.2@63.5,-65.786 63.51,-65.796 LS1.2
NetQ1_2: Q1.2 R6.1 | length 10
  Top Layer w0.381: Q1.2 14.986,-46.685 20.65,-41.021 R6.1
NetR1_1: R1.1 U4.15 | length 24
  Top Layer w0.381: v1(53.213,-56.642) 56.261,-53.594 v1(56.261,-51.308)
  Bottom Layer w0.381: R1.1 48.356,-41.652 56.261,-49.557 v1(56.261,-51.308) ; U4.15 52.65,-59.817 53.379,-59.089 53.379,-56.808 v1(53.213,-56.642)
NetR2_1: R2.1 U4.1 | length 17.4
  Bottom Layer w0.381: R2.1 48.356,-45.017 56.984,-53.645 U4.1
NetR3_1: R3.1 U4.2 | length 16.2
  Bottom Layer w0.381: R3.1 48.356,-48.383 48.64,-48.667 49.606,-48.667 55.626,-54.688 55.626,-56.869 55.587,-56.907 55.587,-59.089 56.255,-59.756 56.923,-59.756 U4.2
NetR4_1: R4.1 U4.3 | length 15.3
  Bottom Layer w0.381: R4.1 48.356,-51.748 48.64,-52.033 51.644,-52.033 54.952,-55.341 54.952,-59.724 56.316,-61.087 U4.3
NetR6_2: R6.2 R8.2 U3.10 | length 82.4
  Top Layer w0.381: R8.2 9.058,-10.328 v1(10.668,-11.938)
  Bottom Layer w0.381: v1(10.668,-11.938) 10.668,-26.797 17.907,-34.036 17.907,-37.719 19.939,-39.751 30.988,-39.751 31.366,-40.129 31.366,-40.836 R6.2 29.464,-43.108 29.464,-44.311 29.781,-44.629 29.781,-46.049 29.464,-46.367 29.464,-48.641 24.956,-53.149 21.018,-53.149 20.32,-53.848 20.32,-63.881 21.336,-64.897 U3.10
NetR7_1: R7.1 U4.4 | length 14.4
  Bottom Layer w0.381: R7.1 53.34,-54.864 54.229,-55.753 54.229,-56.131 54.292,-56.195 54.292,-57.089 54.229,-57.153 54.229,-60.27 56.316,-62.357 U4.4
NetR9_2: R9.2 SW2.4 U3.5 | length 82.7
  Top Layer w0.381: v1(11.176,-75.057) 11.176,-70.231 R9.2 10.795,-69.75 15.648,-64.897 U3.5
  Bottom Layer w0.381: SW2.4 3.756,-30.226 ccw(c4.137,-30.226) 4.137,-30.607 9.489,-30.607 cw(c9.489,-33.147) 11.142,-31.218 cw(c10.894,-31.508) 11.164,-31.239 15.012,-35.087 15.014,-35.089 cw(c14.743,-35.357) 15.124,-35.358 15.119,-36.705 15.108,-39.398 15.102,-40.745 cw(c14.721,-40.745) 15.073,-40.892 cw(c11.513,-39.402) 14.242,-42.131 7.747,-48.626 7.747,-73.025 9.779,-75.057 v1(11.176,-75.057)
NetR10_2: R10.2 SW1.4 U3.4 | length 20.7
  Top Layer w0.381: R10.2 3.937,-54.284 3.937,-56.292 4.16,-56.515 8.921,-56.515 9.144,-56.738 9.144,-61.144 SW1.4 14.143,-62.357 U3.4
NetS1_2: pad.44@66.04,-18.161 XF1.2 | length 30.6
  Top Layer w1.143: XF1.2 48.426,-29.422 48.426,-30.205 48.384,-30.247 48.384,-33.493 49.054,-34.163 59.436,-34.163 62.103,-31.496 62.103,-20.408
NetU3_11: U3.11 U4.12 | length 42.5
  Top Layer w0.381: v1(38.227,-73.66) 39.497,-72.39 48.006,-72.39 49.276,-71.12 v1(49.276,-63.627)
  Bottom Layer w0.381: U3.11 23.622,-62.23 23.622,-62.484 26.332,-65.194 26.332,-66.171 28.995,-68.834 33.401,-68.834 v1(38.227,-73.66) ; v1(49.276,-63.627) U4.12
NetU3_12: U3.12 U4.11 | length 30.6
  Top Layer w0.381: U3.12 33.051,-59.817 38.131,-64.897 v1(47.625,-64.897)
  Bottom Layer w0.381: v1(47.625,-64.897) U4.11
NetU3_13: U3.13 U4.14 | length 30.2
  Top Layer w0.381: U3.13 42.164,-57.277 46.101,-61.214 47.752,-61.214 v1(47.879,-61.087)
  Bottom Layer w0.381: v1(47.879,-61.087) U4.14
pads on no net: J1.8 K1.4 K2.4 SW1.2 SW1.3 SW2.1 SW2.3 U2.2 U4.5 U4.6 U4.7 U4.9

## Polygon pours and split planes (outlines as drawn)
GND on Top Layer "GND_L01_P001" (solid, pour order 1): 1.27,-45.593 ccw(c-25.385,-2.069) 2.159,-45.036 ccw(c-12.908,-1.759) 3.044,-44.718 ccw(c3.042,-44.713) 3.046,-44.71 3.045,-44.707 2.991,-44.734 ccw(c2.994,-44.74) 2.987,-44.74 cw(c3.027,-44.738) 3.048,-44.704 cw(c2.913,-8.594) 2.921,-44.704 cw(c2.924,-44.702) 2.92,-44.703 cw(c2.92,-44.721) 2.923,-44.703 cw(c2.59,-48.054) 3.044,-44.717 cw(c3.051,-44.712) 3.049,-44.703 cw(c2.985,-44.586) 2.92,-44.703 cw(c2.92,-44.704) 2.921,-44.704 cw(c2.79,-44.743) 2.923,-44.772 2.924,-44.768 3.05,-44.703 cw(c3.015,-44.707) 3.05,-44.711 ccw(c5.844,-15.686) 5.588,-44.844 ccw(c5.715,-40.345) 5.842,-44.844 cw(c7.111,-53.645) 8.048,-44.803 9.692,-44.61 ccw(c8.456,-41.084) 9.779,-44.578 ccw(c8.459,-38.895) 10.738,-44.266 ccw(c9.773,-41.668) 11.172,-44.061 ccw(c6.106,-36.816) 14.129,-40.528 37.402,-40.528 61.54,-40.528 ccw(c67.268,-38.492) 65.233,-44.22 ccw(c69.073,-32.762) 68.972,-44.846 ccw(c70.236,-27.485) 73.636,-44.557 ccw(c87.018,-23.533) 75.037,-45.385 ccw(c101.206,-30.801) 75.883,-46.809 75.883,-74.25 cw(c70.148,-70.886) 74.154,-76.192 cw(c72.862,-70.571) 71.903,-76.258 5.073,-76.136 cw(c4.263,-71.941) 3.453,-76.136 cw(c3.466,-70.937) 1.27,-75.649 cw(c5.408,-72.594) 0.306,-71.942 0.306,-49.295 cw(c6.59,-48.142) 0.306,-46.99 cw(c4.596,-48.921)
N on Top Layer "N_L01_P006" (solid, pour order 6): 31.474,-4.572 37.084,-4.572 cw(c33.528,-6.54) 37.084,-8.509 36.842,-8.509 36.576,-8.509 30.353,-8.509 21.333,-18.421 ccw(c21.342,-18.429) 21.33,-18.429 20.994,-27.178 18.415,-27.178 18.415,-22.209 19.177,-14.986 28.974,-4.476 ccw(c31.473,28.014)
NetJ2_2 on Top Layer "NETJ2_2_L01_P007" (solid, pour order 7): 53.721,-5.207 54.102,-5.588 54.102,-9.652 49.276,-9.652 44.069,-14.859 30.861,-14.859 27.305,-18.415 27.305,-22.733 24.13,-25.908 24.13,-32.258 22.987,-33.401 18.415,-33.401 17.526,-32.512 17.526,-29.464 22.098,-29.464 22.098,-24.765 25.4,-21.463 25.4,-17.145 30.861,-11.43 42.799,-11.43 49.022,-5.207
NetJ3_2 on Top Layer "NETJ3_2_L01_P004" (solid, pour order 4): 45.599,-23.21 53.66,-29.337 55.703,-29.337 55.703,-32.385 52.324,-32.385 52.324,-29.792 48.336,-26.797 30.171,-26.797 29.21,-25.836 29.21,-19.05 31.822,-19.05 32.462,-19.69 32.462,-21.722 41.48,-21.722
NetJ3_1 on Top Layer "NETJ3_1_L01_P002" (solid, pour order 2): 44.577,-18.288 49.022,-18.288 52.324,-21.59 55.626,-21.59 55.626,-27.051 cw(c54.797,-27.051) 54.935,-27.868 cw(c54.279,-23.978) 53.522,-27.85 44.577,-21.021 44.577,-19.685
GND on Bottom Layer "GND_L02_P000" (solid, pour order 0): 0.384,-65.799 0.225,-47.649 cw(c3.543,-48.157) 2.526,-44.958 cw(c3.725,-49.37) 3.175,-44.831 cw(c3.683,-51.831) 4.191,-44.831 9.302,-44.838 ccw(c4.603,-32.116) 12.446,-43.18 ccw(c8.44,-38.183) 14.605,-36.449 ccw(c8.234,-37.994) 9.302,-31.526 2.354,-31.526 1.215,-30.944 0.337,-29.868 0.094,-28.854 0.094,-2.519 ccw(c0.091,-2.533) 0.094,-2.546 0.158,-2.409 cw(c1.976,-2.445) 0.337,-1.658 0.721,-1.172 cw(c2.083,-1.957) 2.179,-0.388 ccw(c2.224,-0.029) 2.222,-0.391 2.354,-0.392 2.35,-0.392 2.526,-0.392 42.195,-0.388 65.454,-0.635 65.509,-0.654 cw(c64.292,-4.047) 67.586,-2.584 67.808,-3.082 67.808,-11.973 62.586,-11.973 ccw(c63.316,-12.558) 62.613,-13.176 67.95,-13.176 67.95,-18.676 62.735,-18.669 62.735,-18.676 ccw(c62.941,-19.301) 62.735,-19.927 67.95,-20.073 67.808,-31.306 ccw(c68.11,-38.132) 65.454,-44.427 66.366,-44.677 ccw(c67.877,-39.151) 69.097,-44.748 69.102,-44.752 69.097,-44.748 69.356,-44.757 69.229,-44.757 69.356,-44.698 ccw(c70.078,-49.273) 69.097,-44.747 ccw(c71.131,2.325) 73.167,-44.746 cw(c72.69,-47.72) 75.665,-48.182 75.666,-60.198 75.666,-66.421 75.666,-72.211 cw(c71.992,-73.053) 75.184,-75.057 cw(c72.589,-72.871) 72.877,-76.252 2.642,-76.134 cw(c2.948,-73.523) 0.337,-73.828 0.234,-73.244 0.225,-72.771

## Other copper
Top Layer:
  region net NetS1_2: 62.248,-17.145 ccw(c63.831,-19.363) 62.213,-21.557 67.945,-21.622 67.945,-19.927 62.67,-19.927 cw(c63.085,-19.372) 63.085,-18.679 67.945,-18.679 67.945,-17.145
  region net NetJ2_2: 62.248,-10.287 ccw(c63.831,-12.505) 62.213,-14.699 67.945,-14.764 67.945,-13.176 62.865,-13.171 cw(c63.085,-12.514) 62.896,-11.847 67.945,-11.847 67.945,-10.287

## Silkscreen, mask and mechanical layers (free items; w line width, h text height)
Top Overlay:
  text "N" at 14.351,-26.162 h1.52
  text "M" at 59.563,-26.543 h1.52
  text "L" at 14.351,-32.512 h1.52
  text "-" at 51.181,-39.243 h1.52
  text "+" at 59.182,-39.37 h1.52
  text "L" at 29.083,-40.005 h1.52
  text "N" at 24.257,-40.132 h1.52
Board Shape:
  lines w0.5: 0.064,-47.809 cw(c3.315,-47.942) 3.182,-44.691 8.064,-44.691 ccw(c8.064,-38.191) 8.064,-31.691 3.107,-31.621 cw(c3.107,-28.578) 0.064,-28.578 -0.085,-2.965 cw(c2.893,-2.965) 2.893,0.013 64.998,-0.202 cw(c64.998,-3.275) 68.072,-3.275 ; 0.064,-47.752 0.064,-73.244 ccw(c3.065,-73.244) 3.065,-76.245 73.058,-76.457 ccw(c73.058,-73.533) 75.981,-73.533 75.981,-47.649 ccw(c72.933,-47.649) 72.933,-44.6 68.064,-44.691 cw(c68.064,-38.191) 68.064,-31.691 68.064,-19.968 ; 63.024,-19.927 68.064,-19.962 ; 63.024,-19.897 cw(c63.024,-19.297) 63.024,-18.697 ; 63.024,-18.669 68.199,-18.669 68.199,-13.176 63.024,-13.176 ; 63.024,-13.173 cw(c63.024,-12.573) 63.024,-11.973 68.072,-11.974 ; 68.064,-11.974 68.071,-3.275

## Dimensions
4,-4.115 to 2.893,0.013 on Top Overlay
72,-73 to 73.058,-76.457 on Top Overlay
4,-73 to 3.065,-76.245 on Top Overlay
72,-47.99 to 76.073,-48.387 on Top Overlay
4,-47.99 to 0.064,-47.809 on Top Overlay
4,-47.99 to 4,-73 on Top Overlay
4,-47.99 to 72,-47.99 on Top Overlay
4,-4.115 to -0.085,-2.965 on Top Overlay
65.024,-25.146 to 68.064,-31.691 on Top Overlay
65.024,-4.115 to 65.024,-25.146 on Top Overlay
65.024,-4.115 to 64.998,-0.202 on Top Overlay
65.024,-4.115 to 4,-4.115 on Top Overlay
18.161,-2.413 to -0.085,-2.965 on Top Overlay
18.161,-2.413 to 58,-2.767 on Top Overlay
64.998,-0.202 to 65.024,-12.573 on Board Shape
4,-4.115 to -0.085,-2.965 on Board Shape
4,-4.115 to 2.893,0.013 on Board Shape
4,-47.99 to 4,-4.115 on Board Shape
4,-73 to 4,-47.99 on Board Shape
4,-73 to 0.064,-73.244 on Board Shape
72,-73 to 73.058,-76.457 on Board Shape
4,-73 to 72,-73 on Board Shape
0.064,-73.244 to 75.981,-73.533 on Board Shape
-0.085,-2.965 to 68.071,-3.275 on Board Shape
71.501,-38.191 to 64.998,-0.202 on Board Shape
2.893,0.013 to 3.065,-76.245 on Board Shape

## Text inside footprints (layer, text, board x,y; h text height)
D1: Bottom Overlay "+" at 42.164,-38.1 h0.8
D2: Bottom Overlay "+" at 42.164,-45.466 h0.8
D3: Bottom Overlay "+" at 42.291,-52.705 h0.8
D4: Bottom Overlay "+" at 62.23,-6.096 h0.8
D5: Bottom Overlay "+" at 13.462,-4.445 h0.8 r180
D6: Bottom Overlay "+" at 42.164,-60.071 h0.8
D11: Bottom Overlay "+" at 42.164,-67.31 h0.8